# Allegro board PSclass.brd
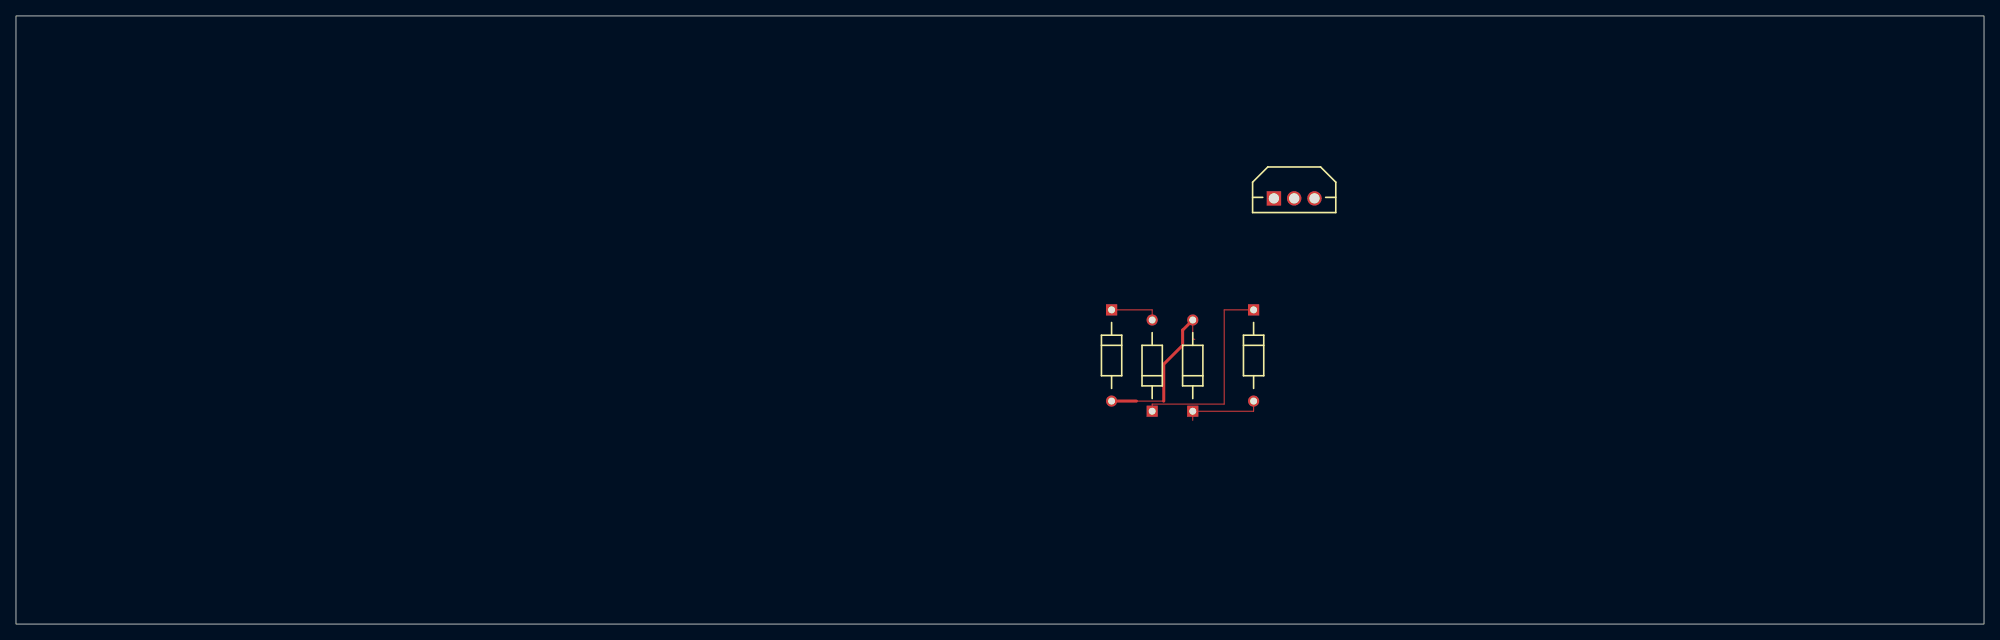
[diagram p0: board, top side]
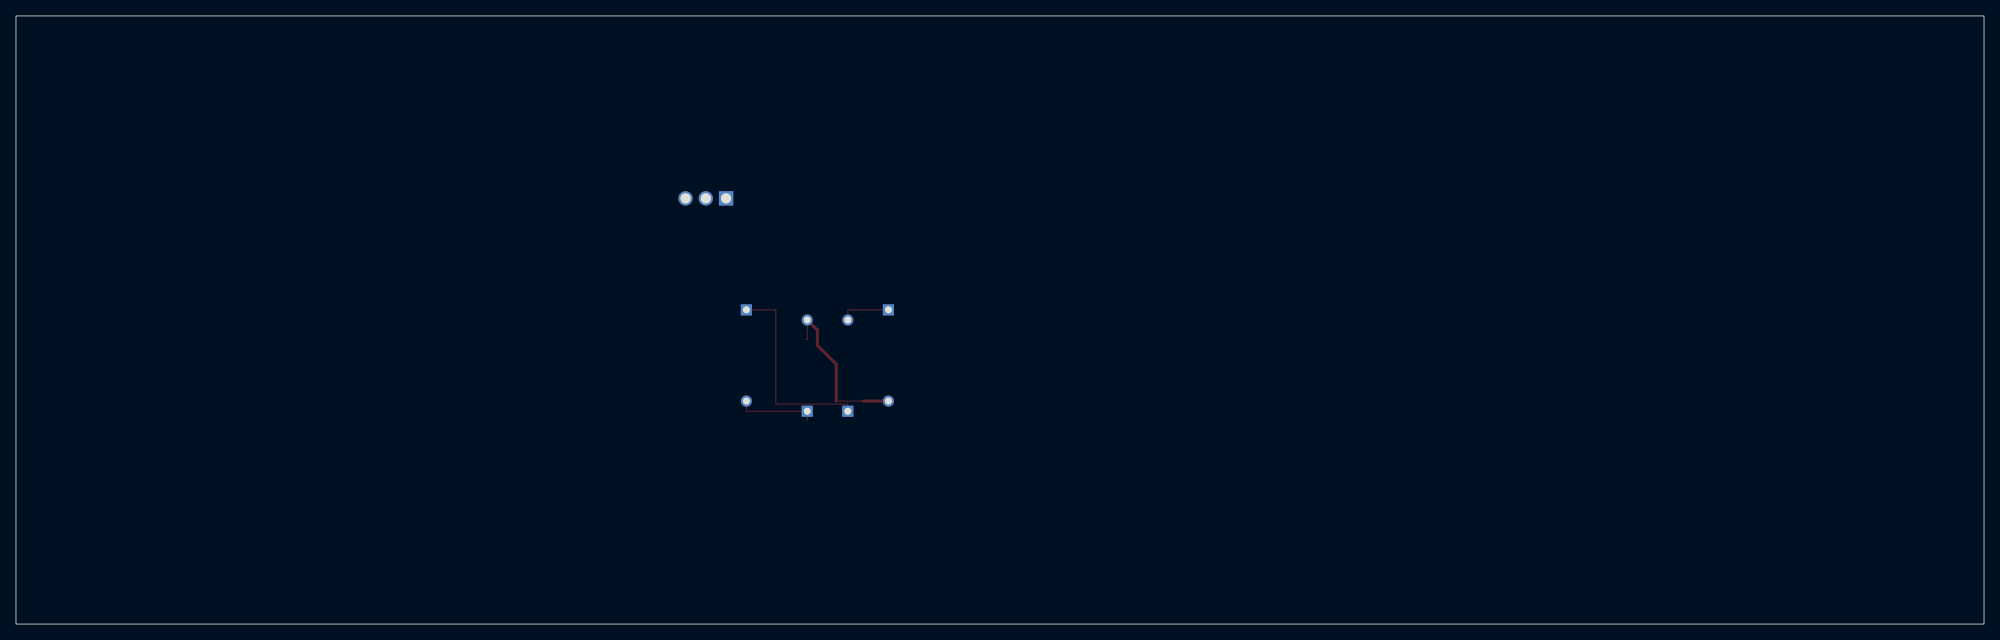
[diagram p1: board, bottom side, seen from below]

Outline 246.38 x 76.2 mm; copper layers: TOP, BOTTOM. Coordinates in mm from the lower left corner of the outline.
Outline path: rectangle 0,0 246.38,76.2

## Design rules (mm)
constraint set DEFAULT: min track width 0.127

## Placement (name value [footprint] x y rotation side)
D1  D1N4148  [DAX2DO35]  137.16 27.94 270 top
D2  D1N4148  [DAX2DO35]  142.24 38.1 90 top
D3  D1N4148  [DAX2DO35]  147.32 38.1 90 top
D4  D1N4148  [DAX2DO35]  154.94 27.94 270 top
U1  LM7805C  [TO202AB]  157.48 53.34 0 top

## Library data of the parts
D1 = 1N4148
D2-D4 = D1N4148
U1 = LM7805C

## Footprints (pads in the part's own frame, mm; a bottom-side part is the same pattern mirrored in y, then rotated)
DAX2DO35
  round 1.397 hole 0.864: 1(0,0)
  rect 1.397x1.397 hole 0.864: 2(-11.43,0)
TO202AB
  rect 1.803x1.803 hole 1.27: 1(0,0)
  round 1.803 hole 1.27: 2(2.54,0) 3(5.08,0)

## Nets
0: D1.1 D3.1 U1.3
N00825: D1.2 D2.1
N00913: D2.2 D4.2 U1.1
N01015: D3.2 D4.1
N01875: U1.2(OUT)

## Routing (per net, layer and track width the routed paths; a pad name or vN(x,y) marks a point on that pad's centre or on a via; arc(x,y) is an arc through that point)
0: length 20.9
  TOP w0.127: 147.57,35.69 147.32,35.69 D3.1 ; 140.27,27.94 143.69,27.94
  TOP w0.381: D3.1 146.05,36.83 146.05,34.93 143.69,32.56 143.69,27.94 ; D1.1 140.27,27.94
N00825: length 6.3
  TOP w0.127: D2.1 142.24,39.37 D1.2
N00913: length 25.4
  TOP w0.127: D2.2 142.24,27.56 151.26,27.56 151.26,39.37 D4.2
N01015: length 10
  TOP w0.127: 147.32,25.53 D3.2 154.94,26.67 D4.1
